# EAGLE board Sensor_board_2_V_1_1 (EAGLE 9.6.2)
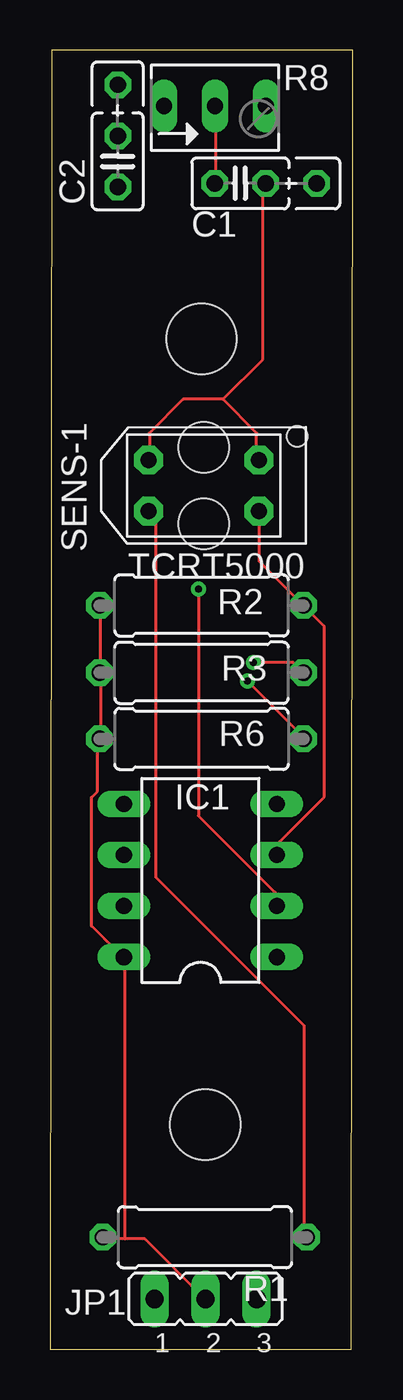
[diagram p0: board, top side]
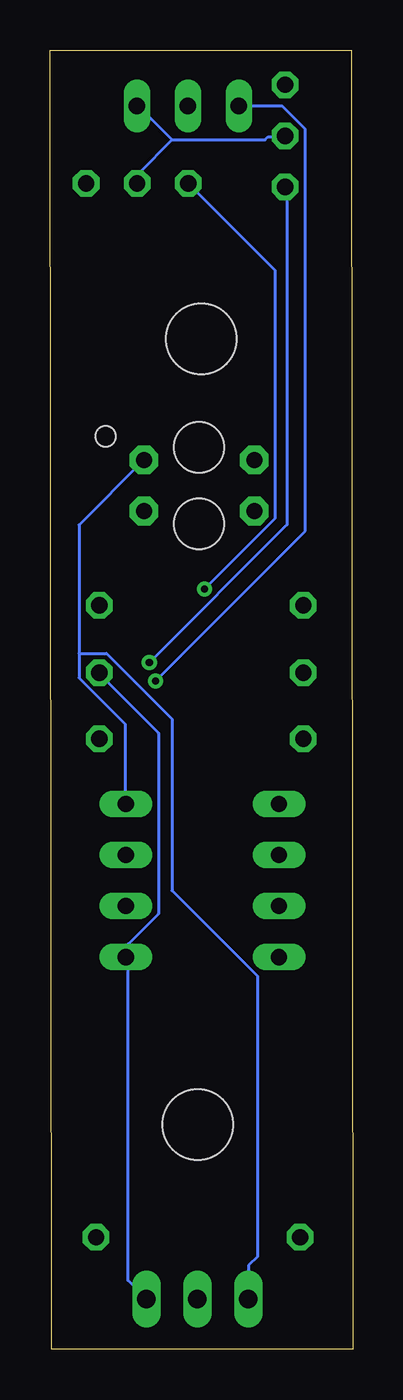
[diagram p1: board, bottom side, seen from below]

Size 15.07 x 64.66 mm. Coordinates in mm from the lower left corner, seen from the top.
Outline: 0,0 15,0 15.07,64.66 0.07,64.66 0,0
Copper layers (1*16): Top 0.035mm / dielectric 1.5mm / Bottom 0.035mm
Design rules "default": minimum track width 6mil, minimum drill 0.35mm, track to track 6mil, track to pad 6mil, pad to pad 6mil, via to via 6mil, smd to smd 6mil, copper to edge 40mil, drill to drill 6mil, minimum pad ring 10mil, minimum via ring 8mil, stop-mask expansion 4mil, vias tented up to drill 0mil, thermal gap 10mil
Holes 3.5 mm at 7.54,50.29 7.72,11.18

## Footprints (pad centres in the part's own frame; a part is rotated, then mirrored left to right if it is on the bottom)
C025_050-025X075 = drill 0.813 octagon: 1 -1.27,0; 2 1.27,0; 3 3.81,0
DIL08 = drill 0.813 long: 1 -3.81,-3.81; 2 -1.27,-3.81; 3 1.27,-3.81; 4 3.81,-3.81; 5 3.81,3.81; 6 1.27,3.81; 7 -1.27,3.81; 8 -3.81,3.81
JP2 = drill 0.914 long: 1 -2.54,0; 2 0,0; 3 2.54,0
0309/10 = drill 0.813 octagon: 1 -5.08,0; 2 5.08,0
B64Y = drill 0.813 long: A 2.54,0; E -2.54,0; S 0,0
5000 = drill 0.8 pad 1.422 octagon: P$1 -2.75,1.27; P$2 -2.75,-1.27; P$3 2.75,1.27; P$4 2.75,-1.27 | hole 2.5: 0,1.9; 0,-1.9 | hole 1: -4.65,-2.45

## Placement (x,y rotation side)
C1  100nF  [C025_050-025X075]  9.47,58.03 0 top
C2  100nF  [C025_050-025X075]  3.37,59.12 90 top
IC1  LM393N  [DIL08]  7.48,23.33 90 top
JP1  [JP2]  7.74,2.5 0 top
R1  330R  [0309/10]  7.7,5.58 180 top
R2  10K  [0309/10]  7.54,37.02 0 top
R3  10K  [0309/10]  7.54,33.67 0 top
R6  1K  [0309/10]  7.54,30.38 180 top
R8  10K  [B64Y]  8.21,61.89 0 top
SENS-1  TCRT5000  [5000]  7.65,42.99 180 top

## Library data of the parts
C1 C2 R1-R3 R6 = resistor
IC1 = linear4
JP1 = jumper
R8 = pot
SENS-1 = qfm-trx1-24g

## Nets
N$1: IC1.8 JP1.2 R1.2 R2.1 R3.1 R6.2
N$3: C1.2 C2.2 IC1.4 JP1.1 R8.A SENS-1.P$2 SENS-1.P$4
N$4: R1.1 SENS-1.P$3
N$5: IC1.3 R2.2 SENS-1.P$1
N$6: C2.1 IC1.1 JP1.3 R3.2
N$8: R6.1 R8.E
N$9: C1.1 IC1.2 R8.S

## Tracks (layer width: path | path; a pad name or v marks a point on that pad's centre or on a via)
N$1
  Top 0.152: R2.1 2.51,36.92 2.51,33.72 R3.1 2.51,33.56 2.51,30.52 R6.2 2.36,30.36 2.36,27.77 2.05,27.47 2.05,21.07 3.58,19.54 IC1.8 3.73,19.39 3.73,5.49 | 3.73,5.49 4.72,5.49 7.62,2.59 JP1.2 | 3.73,5.49 2.74,5.49 R1.2
N$3
  Top 0.152: 8.61,47.28 6.62,47.28 4.95,45.6 4.95,44.38 SENS-1.P$4 | 8.61,47.28 10.28,45.6 10.28,44.38 SENS-1.P$2 | 8.61,47.28 10.59,49.26 10.59,57.77 C1.2
  Bottom 0.152: 8.99,60.2 4.37,60.2 4.21,60.35 3.5,60.35 C2.2 | 8.99,60.2 10.67,61.87 R8.A | 8.99,60.2 10.67,58.52 10.67,58.06 C1.2 | 13.63,34.63 13.63,41.03 10.44,44.23 SENS-1.P$2 | 13.63,34.63 13.63,33.41 11.35,31.13 11.35,27.16 IC1.4 | 13.63,34.63 12.26,34.63 9,31.37 9,22.84 4.74,18.57 4.74,4.61 5.18,4.17 5.18,2.59 JP1.1
N$4
  Top 0.152: R1.1 12.65,5.64 12.65,16.11 5.25,23.51 5.25,41.34 4.95,41.64 SENS-1.P$3
N$5
  Top 0.152: IC1.3 11.35,24.73 11.35,25.18 13.63,27.47 13.63,36 12.72,36.92 R2.2 12.57,37.07 10.44,39.2 10.44,41.64 SENS-1.P$1
N$6  (via drill 0.35)
  Top 0.152: v10.13,34.17 12.11,34.17 12.57,33.72 R3.2
  Bottom 0.152: JP1.3 10.36,2.59 11.2,3.42 11.2,19.39 IC1.1 11.2,19.54 11.2,20.15 9.67,21.68 9.67,30.67 12.57,33.56 R3.2 | C2.1 3.27,57.75 3.27,41.04 v10.13,34.17
N$8  (via drill 0.35)
  Top 0.152: v9.82,33.26 12.57,30.52 R6.1
  Bottom 0.152: v9.82,33.26 2.36,40.73 2.36,60.73 3.5,61.87 5.64,61.87 R8.E
N$9  (via drill 0.35)
  Top 0.152: C1.1 8.23,58.06 8.23,61.87 R8.S | v7.39,37.83 7.39,26.55 11.2,22.74 11.2,22.13 IC1.2
  Bottom 0.152: v7.39,37.83 3.88,41.34 3.88,53.72 8.08,57.91 C1.1